# EAGLE board Transimpedance amplifier (EAGLE 9.5.2)
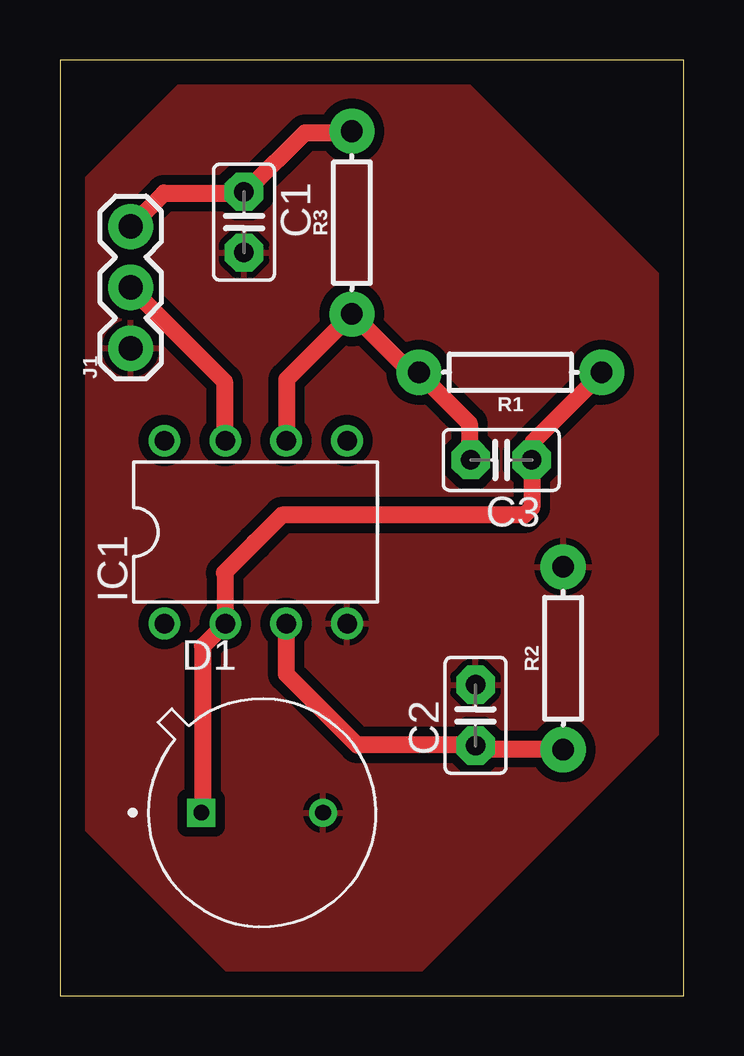
[diagram p0: board, top side]

Size 26 x 39 mm. Coordinates in mm from the lower left corner, seen from the top.
Outline: 0,0 26,0 26,39 0,39 0,0
Copper layers (1*16): Top 0.035mm / dielectric 1.5mm / Bottom 0.035mm
Design rules "default": minimum track width 6mil, minimum drill 0.35mm, track to track 6mil, track to pad 6mil, pad to pad 6mil, via to via 6mil, smd to smd 6mil, copper to edge 40mil, drill to drill 6mil, minimum pad ring 10mil, minimum via ring 8mil, stop-mask expansion 4mil, vias tented up to drill 0mil, thermal gap 10mil
Net classes: 1 Ground: width 1.27 mm, drill 0.508 mm, clearance 0.152 mm

## Footprints (pad centres in the part's own frame; a part is rotated, then mirrored left to right if it is on the bottom)
C2.5-2 = drill 0.813 pad 1.6 octagon: 1 -1.27,0; 2 1.27,0
TO254P950H570-2 = drill 0.65 pad 1.05: A 2.54,0 | drill 0.65 pad 1.05 square: C -2.54,0
DIL08 = drill 0.813 pad 1.27: 1 -3.81,-3.81; 2 -1.27,-3.81; 3 1.27,-3.81; 4 3.81,-3.81; 5 3.81,3.81; 6 1.27,3.81; 7 -1.27,3.81; 8 -3.81,3.81
1X03 = drill 1.016 pad 1.88: 1 0,0; 2 2.54,0; 3 5.08,0
AXIAL-0.3 = drill 0.9 pad 1.88: P$1 -3.81,0; P$2 3.81,0

## Placement (x,y rotation side)
C1  [C2.5-2]  7.67,32.24 270 top
C2  [C2.5-2]  17.33,11.68 90 top
C3  [C2.5-2]  18.4,22.33 180 top
D1  BPW_21  [TO254P950H570-2]  8.43,7.62 0 top
IC1  LM308N  [DIL08]  8.16,19.32 0 top
J1  455-1750-1-ND  [1X03]  2.95,26.98 90 top
R1  1k  [AXIAL-0.3]  18.78,25.98 180 top
R2  1k  [AXIAL-0.3]  20.98,14.06 90 top
R3  1k  [AXIAL-0.3]  12.17,32.22 90 top

## Library data of the parts
C1-C3 = capacitor-wima
D1 = BPW_21; AVAILABILITY: Unavailable; DESCRIPTION: Photodiode 550nm 1.5µs 110° TO-39; MF: OSRAM Opto; MP: BPW 21; PACKAGE: TSSOP-14 OSRAM Opto Semiconductors Inc; PRICE: None
IC1 = linear
J1 = SparkFun-Connectors; PROD_ID: XXX-00000
R1 R2 = SparkFun-Resistors; PROD_ID: RES-08380
R3 = SparkFun-Resistors; PROD_ID: RES-12182

## Nets
GND [Ground]: C1.2 C2.2 D1.A IC1.4 J1.1 R2.P$2
N$1 [Ground]: C3.1 D1.C IC1.2 R1.P$1
N$2 [Ground]: C3.2 IC1.6 R1.P$2 R3.P$1
N$3 [Ground]: C2.1 IC1.3 R2.P$1
N$4: IC1.1
N$5 [Ground]: C1.1 J1.3 R3.P$2
N$7 [Ground]: IC1.7 J1.2
N$8: IC1.8

## Tracks (layer width: path | path; a pad name or v marks a point on that pad's centre or on a via)
GND
  pour Top (isolate 0.406): 1,34 1,7 7,1 15,1 25,11 25,30 17,38 5,38
N$1
  Top 0.7: D1.C 5.94,7.62 5.94,14.55 6.86,15.47 IC1.2 6.89,17.64 6.86,17.62 6.85,17.62 8.11,18.89 9.26,20.03 19.36,20.03 19.67,20.34 C3.1 19.74,22.4 19.74,23.09 22.55,25.91 R1.P$1
N$2
  Top 0.7: C3.2 17.07,22.4 17.07,23.85 15.01,25.91 R1.P$2 14.78,26.06 14.55,26.06 12.34,28.27 R3.P$1 12.12,28.35 9.45,25.68 9.45,23.16 IC1.6
N$3
  Top 0.7: IC1.3 9.43,13.4 12.39,10.44 17.3,10.44 C2.1 17.53,10.29 20.95,10.29 R2.P$1
N$5
  Top 0.7: J1.3 2.97,32.08 4.34,33.45 7.62,33.45 C1.1 7.85,33.6 10.21,35.97 12.12,35.97 R3.P$2
N$7
  Top 0.7: IC1.7 6.86,23.16 6.86,25.6 2.97,29.49 J1.2